# Altium PCB SingleBoard.PcbDoc
Units mil, origin at the board's own origin, x right, y up, seen from the top; angles counter-clockwise.
Board outline 2110 x 655 mil, 2 copper layers (Top Layer, Bottom Layer), stack 22.879 mil thick; 26 components, 13 nets, 68 pads, 3 vias.
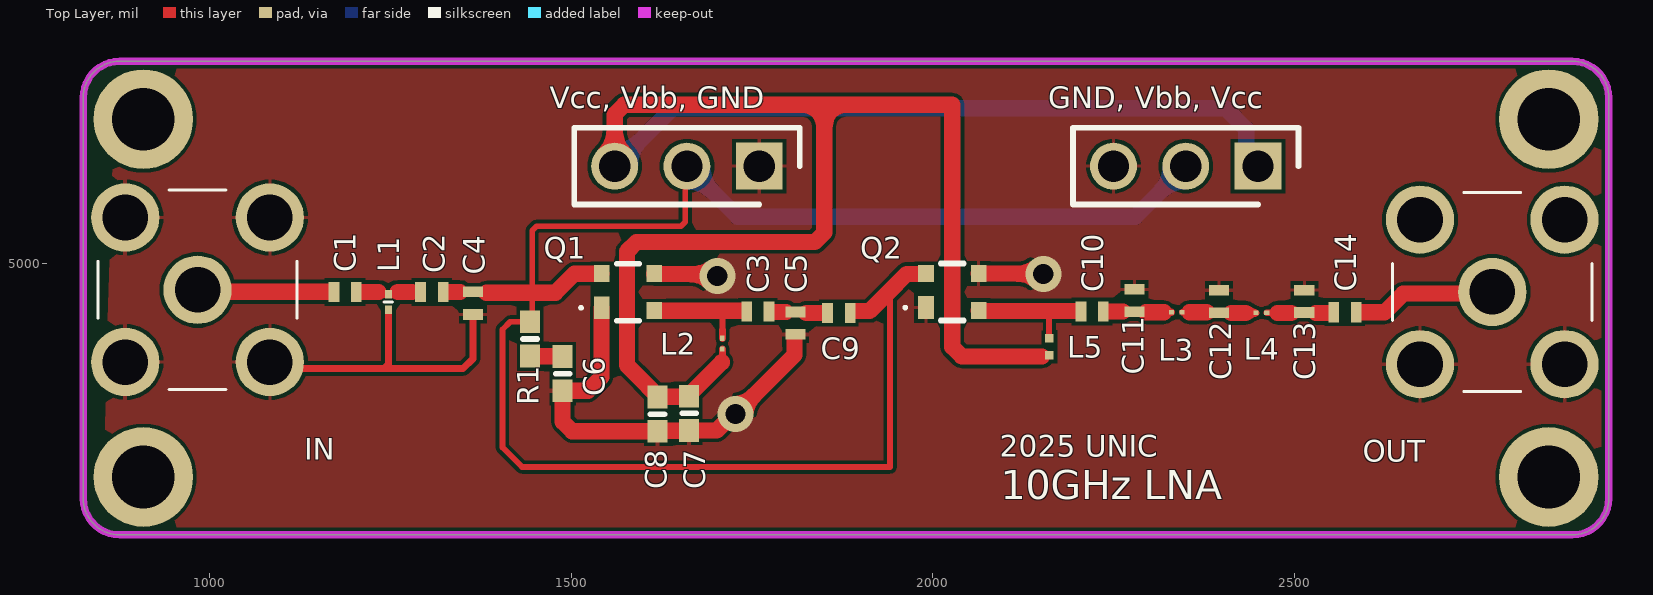
[diagram p0: Top Layer view]
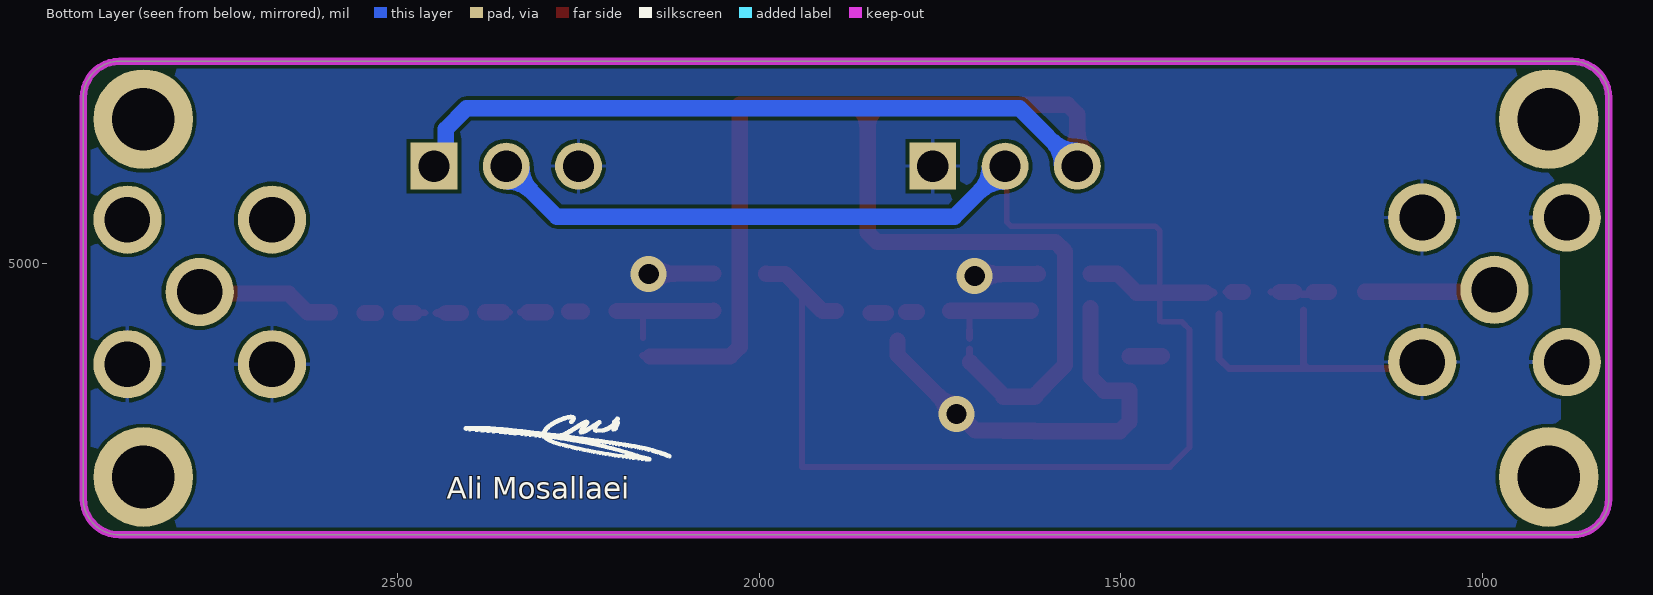
[diagram p1: Bottom Layer view, seen from below]

## Layer stack, top to bottom
Top Solder: solder mask 0.4, Solder Resist, Dk 3.5
Top Layer: signal copper 1.4
Dielectric 1: dielectric 20.0787, Rogers 4350B, Dk 3.48
Bottom Layer: signal copper 1.4
Bottom Solder: solder mask 0.4, Solder Resist, Dk 3.5

## Board outline
825,4675 825,5230 cw(c875,5230) 875,5280 2885,5280 cw(c2885,5230) 2935,5230 2935,4675 cw(c2885,4675) 2885,4625 875,4625 cw(c875,4675)

## Design rules (kind name [scope] priority, off if disabled: settings)
BoardOutlineClearance [All] p1: gap=7.87 ignorepadtopadclearanceinfootprint=FALSE
Clearance [All] p1: gap=5 ignorepadtopadclearanceinfootprint=TRUE
ComponentClearance [All] p1: gap=5 collisioncheckmode=3 verticalgap=5 showdistances=TRUE
DiffPairsRouting [All] p1: maxlimit=10 minlimit=5 mostfreqgap=5 toplayer_minwidth=5 toplayer_maxwidth=1000 toplayer_prefwidth=5 bottomlayer_minwidth=5 bottomlayer_maxwidth=1000 bottomlayer_prefwidth=5 maxuncoupledlength=500
Height [All] p1: minheight=0 maxheight=71497.94 prefheight=500
HoleSize [All] p1: absolutevalues=TRUE maxlimit=248.03 minlimit=11.81 maxpercent=80.000 minpercent=20.000
HoleToHoleClearance [All] p1: gap=9.84 allowstackedmicrovias=FALSE
MinimumAnnularRing [All] p1: minimumring=3
MinimumSolderMaskSliver [All] p1: minsoldermaskwidth=0
PlaneClearance [All] p1: clearance=5
PlaneConnect PlaneConnectPowerPads [InPadClass('PowerPads')] p1: planeconnectstyle=Direct reliefexpansion=20 reliefentries=4 reliefconductorwidth=10 reliefairgap=10
PlaneConnect [All] p2: pad.planeconnectstyle=Relief pad.reliefexpansion=11.81 pad.reliefentries=4 pad.reliefconductorwidth=5 pad.reliefairgap=5 via.planeconnectstyle=Direct via.reliefexpansion=11.81 via.reliefentries=4 via.reliefconductorwidth=5 via.reliefairgap=5
PolygonConnect PolygonConnectPowerPads [All vs (InPadClass('PowerPads'))] p1: connectstyle=Direct reliefconductorwidth=10 reliefentries=4 polygonreliefangle="90 Angle" airgapwidth=10
PolygonConnect [All] p2: thpad.connectstyle=Relief thpad.reliefconductorwidth=5 thpad.reliefentries=4 thpad.polygonreliefangle="90 Angle" thpad.airgapwidth=5 smdpad.connectstyle=Relief smdpad.reliefconductorwidth=5 smdpad.reliefentries=4 smdpad.polygonreliefangle="90 Angle" smdpad.airgapwidth=5 via.connectstyle=Direct via.reliefconductorwidth=5 via.reliefentries=4 via.polygonreliefangle="90 Angle" via.airgapwidth=5
RoutingVias [All] p1: holewidth=11.81 width=23.62 viastyle="Through Hole" minholewidth=11.81 minwidth=23.62 maxholewidth=23.62 maxwidth=259.84
SilkToSilkClearance [All] p1: silktosilkclearance=0
SilkToSolderMaskClearance [IsPad] p1: minsilkscreentomaskgap=5 clearancetoexposedcopper=TRUE
SolderMaskExpansion SolderMask_TentVias [IsVia] p1: expansion=4 istentingtop=FALSE
SolderMaskExpansion [All] p2: expansion=2.95 istentingtop=FALSE
SupplyNets "Schematic Supply Nets" [InNet('GND')] p1: voltage=0.000
Width Microstrip [All] p1: maxlimit=22.38 minlimit=10 preferedwidth=22.38 impedanceprofiledriven=TRUE impedanceprofileid={C9AD6396-50C5-4D6C-8EEC-34C26894E990} impedanceprofilevalue=50.000000 minimp=50.000000 maximp=50.000000 favimp=50.000000
Width [All] p2: maxlimit=1000 minlimit=5 preferedwidth=5 minimp=50.000000 maximp=50.000000 favimp=50.000000
20 further rules are at their usual default settings.

## Classes and differential pairs
component class Niner: "GND, Vbb, Vcc" "Vcc, Vbb, GND"
component class AMP1: C1 C2 C3 C4 C5 C6 C7 C8 C9 C10 C11 C12 C13 C14 IN L1 L2 L3 L4 L5 OUT Q1 Q2 R1

## Components (designator, comment, footprint, x,y, rotation, side; value= is the part's Value field where it differs from the comment)
C1 "QSCF500Q0R7B1GV001T" JT_0402 1189,4956 r180 top value=0.7p
C2 "GQM1555C2DR60WB01D" JT_0402 1309,4956 r180 top value=0.6p
C3 "GQM1555C2DR40WB01" JT_0402 1756,4939 r0 top value=0.4pF
C4 "GQM1555C2DR40WB01" JT_0402 1369,4947.38 r270 top value=0.4pF
C5 "GQM1555C2DR40WB01" JT_0402 1805,4916 r90 top value=0.4pF
C6 "GCQ0335C1HR60WB01D" 0402 1488,4848 r90 top value=100pF
C7 "GCQ0335C1HR60WB01D" 0402 1663,4793 r90 top value=1nF
C8 "GCQ0335C1HR60WB01D" 0402 1619,4792 r90 top value=100pF
C9 "QSCF500Q0R7B1GV001T" JT_0402 1872,4927 r180 top value=0.7p
C10 "GQM1555C2DR70WB01" JT_0402 2222.38,4929 r180 top value=0.7p
C11 "GQM1555C2DR40WB01" JT_0402 2284,4951 r270 top value=0.4pF
C12 "GQM1555C2DR60WB01D" JT_0402 2391,4946 r90 top value=0.6p
C13 "GQM1555C2DR40WB01" JT_0402 2519,4950 r270 top value=0.4pF
C14 "QSCF500Q0R7B1GV001T" JT_0402 2572,4928 r180 top value=0.7p
"GND, Vbb, Vcc" "61300311121" HDRV3W64P0X254_1X3_762X254X869P 2450,5135 r180 top
IN "SMA-J-P-H-RA-TH1" SMAJPHRATH1 983,4964 r270 top
L1 "LQP03TN0N6B02D" LQP03TG3N1B02D 1247,4947 r270 top value=0.6nH
L2 "LQP02HQ0N4W02L" LQP02HQ0N2B02E 1709,4889.48 r270 top
L3 "LQP02HQ0N9W02L" LQP02HQ0N2B02E 2337.52,4933 r0 top
L4 "LQP02HQ0N9W02L" LQP02HQ0N2B02E 2454.52,4932 r0 top
L5 "LQP03HQ0N5W02D" LQP03HQ0N5B02D 2161,4880 r270 top
OUT "SMA-J-P-H-RA-TH1" SMAJPHRATH1 2774,4961 r90 top
Q1 "BFU710F,115" BFU710F115 1578.42,4960.65 r0 top
Q2 "BFU710F,115" BFU710F115 2027,4961 r0 top
R1 "Resistor" 0402 1443,4896 r90 top value=10
"Vcc, Vbb, GND" "61300311121" HDRV3W64P0X254_1X3_762X254X869P 1760,5135 r180 top

## Footprints (in the part's own frame and the unit in brackets; to place one, negate y for a bottom-side part, rotate by r counter-clockwise, add the part's x,y. Pads: shape width x height; smd on the part's side, far side on the other; paste and mask are expansions set on the pad)
0402 [mm] "Body 1.0 x 0.5 mm (LxW typ)"
  rect 0.8x0.7 smd: 1(-0.6,0) 2(0.6,0)
  silkscreen extent 0,-0.25 0,0.25, body extent -0.5,-0.25 0.5,0.25, height 0.35
BFU710F115 [mm]
  rect 0.55x0.8 smd: 1(-0.925,-0.55)
  rect 0.55x0.6 smd: 2(-0.925,0.65) 3(0.925,0.65) 4(0.925,-0.65)
  silkscreen extent -1.7,-1 0.4,1
HDRV3W64P0X254_1X3_762X254X869P [mm]
  rect 1.65x1.65 hole 1.1: 1(0,0)
  round 1.65 hole 1.1: 2(2.54,0) 3(5.08,0)
  silkscreen extent -1.42,-1.35 6.5,1.35, body extent -1.27,-1.27 6.35,1.27, height 8.69
JT_0402 [mil]
  rect 14.5x28 smd: 1(-13.62,-5)
  rect 15x28 smd: 2(17.38,-5)
  body extent -18,-17 22,7, height 14
LQP02HQ0N2B02E [mm]
  rect 0.18x0.16 smd: 1(-0.19,0) 2(0.19,0)
  body extent -0.2,-0.15 0.2,0.15, height 0.32
LQP03HQ0N5B02D [mm]
  rect 0.3x0.3 smd: 1(-0.427,0) 2(0.173,0)
  body extent -0.43,-0.15 0.17,0.15, height 0.42
LQP03TG3N1B02D [mm]
  rect 0.3x0.25 smd: 1(-0.275,0) 2(0.275,0)
  silkscreen extent 0,-0.15 0,0.15, body extent -0.3,-0.15 0.3,0.15, height 0.33
SMAJPHRATH1 [mm]
  round 2.4 hole 1.6: 1(0,0) 2(-2.54,2.54) 3(-2.54,-2.54) 4(2.54,-2.54) 5(2.54,2.54)
  silkscreen extent -3.5,-3.5 3.5,3.5, body extent -3.5,-11.48 3.5,3.62, height 9.85

## Part data
C1 C2 C3 C4 C5 C6 C7 C8 C9 C10 C11 C12 C13 C14: library part "Capacitor Ceramic"
"GND, Vbb, Vcc" "Vcc, Vbb, GND": "Connector", Manufacturer_Name="Wurth Elektronik", Mouser Part Number=710-61300311121, Datasheet Link=http://katalog.we-online.de/em/datasheet/6130xx11121.pdf, Height=8.69mm, Manufacturer_Part_Number=61300311121, Mouser Price/Stock=https://www.mouser.co.uk/ProductDetail/Wurth-Elektronik/61300311121?qs=PhR8RmCirEYxRWFJzNKsUw%3D%3D
IN OUT: "Connector", Manufacturer_Name=SAMTEC, Mouser Part Number=200-SMAJPHRATH1, Arrow Part Number=SMA-J-P-H-RA-TH1, Arrow Price/Stock=https://www.arrow.com/en/products/sma-j-p-h-ra-th1/samtec?region=europe, Datasheet Link=http://suddendocs.samtec.com/prints/sma-j-p-x-ra-th1-mkt.pdf, Height=9.86mm, Manufacturer_Part_Number=SMA-J-P-H-RA-TH1, Mouser Price/Stock=https://www.mouser.co.uk/ProductDetail/Samtec/SMA-J-P-H-RA-TH1?qs=IAPfasySNH9bBmPI%2F132gw%3D%3D
L1: "Inductor", Manufacturer_Name="Murata Electronics", Mouser Part Number=81-LQP03TN0N6B02D, Datasheet Link=https://search.murata.co.jp/Ceramy/image/img/P02/JELF243C-0015.pdf, Height=0.33mm, Manufacturer_Part_Number=LQP03TN0N6B02D, Mouser Price/Stock=https://www.mouser.com/Search/Refine.aspx?Keyword=81-LQP03TN0N6B02D
L2: "Inductor", Manufacturer_Name="Murata Electronics", Mouser Part Number=81-LQP02HQ0N4W02L, Datasheet Link=https://search.murata.co.jp/Ceramy/image/img/P02/JELF243C-0023.pdf, Height=0.32mm, Manufacturer_Part_Number=LQP02HQ0N4W02L, Mouser Price/Stock=https://www.mouser.co.uk/ProductDetail/Murata-Electronics/LQP02HQ0N4W02L?qs=70cth9uAySen4TtaTnoOUg%3D%3D
L3 L4: "Inductor", Manufacturer_Name="Murata Electronics", Mouser Part Number=81-LQP02HQ0N9W02L, Datasheet Link=https://search.murata.co.jp/Ceramy/image/img/P02/JELF243C-0023.pdf, Height=0.32mm, Manufacturer_Part_Number=LQP02HQ0N9W02L, Mouser Price/Stock=https://www.mouser.co.uk/ProductDetail/Murata-Electronics/LQP02HQ0N9W02L?qs=70cth9uAySf%252Bytje7ApwGQ%3D%3D
L5: "Inductor", Manufacturer_Name="Murata Electronics", Mouser Part Number=81-LQP03HQ0N5W02D, Datasheet Link=https://search.murata.co.jp/Ceramy/image/img/P02/JELF243C-0021.pdf, Height=0.42mm, Manufacturer_Part_Number=LQP03HQ0N5W02D, Mouser Price/Stock=https://www.mouser.co.uk/ProductDetail/Murata-Electronics/LQP03HQ0N5W02D?qs=xZ%2FP%252Ba9zWqaDUf%2FupWIkIQ%3D%3D
Q1 Q2: "Transistor BJT NPN", Manufacturer_Name=NXP, Mouser Part Number=771-BFU710F115, Datasheet Link=http://www.nxp.com/docs/en/data-sheet/BFU710F.pdf, Height=0.75mm, Manufacturer_Part_Number=BFU710F,115, Mouser Price/Stock=https://www.mouser.com/Search/Refine.aspx?Keyword=771-BFU710F115
R1: "Resistive element"

## Free pads (board coordinates)
  round 137.8 hole 86.61 unplated: 2(908,4705) 2(908,5200) 2(2852,4705) 2(2852,5200)

## Via types
v1: diameter 50, hole 28, Top Layer to Bottom Layer, 3 vias

## Nets (pads, with @x,y where several pads share a name; then routed paths per layer and width w, separated by ;. In a path a pad name is that pad's centre, name@x,y a point inside that pad or via, vN(x,y) a via of type N, cw(c..) or ccw(c..) an arc to the next point about the centre after c; other vN are vias at no path point)
GND: "GND, Vbb, Vcc.3" "Vcc, Vbb, GND.1" C4.2 C5.1 C6.1 C7.1 C8.1 C11.1 C12.2 C13.1 IN.2 IN.3 IN.4 IN.5 L1.2 OUT.2 OUT.3 Q1.1 Q1.3 Q2.1 Q2.3 | length 1206.9
  Top Layer w10: IN.5 1092,4855 1241.14,4855 ; L1.2 1247,4860.86 1241.14,4855 ; C4.2 1364,4868.72 1350.28,4855 1241.14,4855
  Top Layer w22.38: Q1.1 1542,4843.49 1522.89,4824.38 C6.1 1488,4781.49 1501.11,4768.38 C8.1 1619.5,4768.88 1662.5,4768.88 C7.1 1701.13,4769.38 1723.75,4792 v1(1727,4792) 1808.92,4873.92 1808.92,4894 ; Q1.3 1614.83,4985.99 1615.2,4985.62 1699.38,4985.62 v1(1702,4983) ; Q2.3 2063.71,4986.3 2152.7,4986.3 v1(2153,4986) ; OUT.2@2643.2,4851.2 OUT.2@2645.1,4853.1
NetC1_1: C1.1 C2.2 L1.1 | length 64.5
  Top Layer w10: 1233.31,4961 1236.65,4957.65 L1.1@1248.73,4957.65 ; C2.2@1285.19,4961 C2.2
  Top Layer w22.38: 1212,4961 1233.31,4961 ; 1259.92,4961 1279.92,4961
NetC1_2: C1.2 IN.1 | length 179.2
  Top Layer w22.38: IN.1 985.7,4961.3 1036,4961.3 1036.15,4961.15 ; 1037.15,4961.15 1162,4961.15
NetC3_1: C3.1 L2.1 Q1.4 | length 150.2
  Top Layer w8: 1709,4909.07 1709,4935.06
  Top Layer w10: L2.1 1709,4909.07
  Top Layer w22.38: Q1.4@1624,4935.06 1709,4935.06 1735.75,4935.06 C3.1@1736,4934.81
NetC6_2: C6.2 R1.1 | length 45.3
  Top Layer w22.38: R1.1 1443.38,4872 1487.62,4872 C6.2
NetC10_1: C10.1 C11.2 L3.1 | length 53
  Top Layer w10: 2319.8,4933 L3.1
  Top Layer w22.38: 2245,4934 2263,4934 ; 2295,4933 2319.8,4933
NetC10_2: C10.2 L5.1 Q2.4 | length 168.8
  Top Layer w8: L5.1@2161,4897.15 2161,4932
  Top Layer w22.38: Q2.4 2063.42,4935.16 2063.78,4934.79 2197,4934.79
NetC12_1: C12.1 L3.2 L4.1 | length 68
  Top Layer w9: L3.2 2355.04,4933
  Top Layer w10: 2433.04,4932 L4.1
  Top Layer w22.38: 2355.04,4933 2379,4933 ; 2413,4932 2433.04,4932
NetC14_1: C14.1 OUT.1 | length 203.6
  Top Layer w22.38: 2594,4933 2625,4933 2650.7,4958.7 OUT.1@2787,4958.7
Stage1Out: C3.2 C5.2 C9.2 | length 36.1
  Top Layer w22.38: 1782,4933.38 C5.2@1797.05,4933.38 ; 1825,4932 1846,4932
Stage2Out: C13.2 C14.2 L4.2 | length 50
  Top Layer w9: L4.2 2476,4932 2477.06,4932
  Top Layer w22.38: 2477.06,4932 2496.04,4932 ; 2530,4932 2546,4932
Vbb: "GND, Vbb, Vcc.2" "Vcc, Vbb, GND.2" C2.1 C4.1 C9.1 Q1.2 Q2.2 R1.2 | length 2492.2
  Top Layer w8: R1.2 1415.62,4919.62 1405,4909 1405,4746 1432,4719 1940.82,4719 1940.82,4957.76 ; R1.2@1446,4920.65 1446,4960 1446,5045.95 1451.86,5051.81 1651.73,5051.81 1657.59,5057.66 1657.59,5142.59
  Top Layer w10: 1346,4961 C4.1@1354,4961 ; C4.1@1371.33,4960 1382.71,4960 ; 1938.29,4960.29 1940.82,4957.76
  Top Layer w22.38: 1331,4961 1346,4961 ; 1382.71,4960 1446,4960 1478,4960 1504.24,4986.24 Q1.2 ; 1894,4934.58 1912.58,4934.58 1938.29,4960.29 1964,4986 1990.22,4986 1990.58,4986.37 Q2.2
  Bottom Layer w22.38: 1660,5135 1730,5065 2280,5065 2350,5135
Vc: "GND, Vbb, Vcc.1" "Vcc, Vbb, GND.3" C7.2 C8.2 L2.2 L5.2 | length 2771.9
  Top Layer w10: 1709,4873.87 L2.2 ; L5.2@2155.25,4867.43 L5.2
  Top Layer w22.38: 1560,5155 1560,5206.89 1573.11,5220 1850,5220 ; 1708,4864 1708,4863.59 1663,4818.59 C7.2 1662.5,4816.12 1619.5,4816.12 C8.2 1616.41,4818.21 1616.41,4820.18 1577,4859.59 1577,5016.89 1590.11,5030 1836.89,5030 1850,5043.11 1850,5220 ; 2151.25,4871.86 2040.11,4871.86 2027,4884.97 2027,5220 1850,5220
  Bottom Layer w22.38: 1560,5135 1640,5215 2405,5215 2433.66,5186.34 2433.66,5151.34 2450,5135
pads on no net: OUT.4 OUT.5

## Polygon pours and split planes (outlines as drawn)
GND on Bottom Layer "GND_L02_P000" (solid, pour order 0): 895,5345 905,5335 3930,5335 3930,4595 3940,4585 3915,4560 890,4560
GND on Top Layer "GND_L01_P001" (solid, pour order 1): 870,5345 3945,5345 3950,5340 3930,5320 3930,4575 855,4575 850,4570

## Keep-outs
Keep-Out Layer:
  the board outline again, w10

## Silkscreen, mask and mechanical layers (free items; w line width, h text height)
Top Overlay:
  text "2025 UNIC" at 2093,4733 h30
  text "10GHz LNA" at 2094,4674 h40
Bottom Overlay:
  region: 1935 vertices and 2 holes, not listed, extent 2121.54,4726.77 2408.6,4790.9
  text "Ali Mosallaei" at 2432,4675 h30